# Altium PCB SMA Dual Filter.PcbDoc
Units mm, origin at the board's own origin, x right, y up, seen from the top; angles counter-clockwise.
Board outline 12 x 7.2 mm, 4 copper layers (Top Layer, Layer 1, Layer 2, Bottom Layer), stack 0.771 mm thick; 10 components, 4 nets, 38 pads, 60 vias.
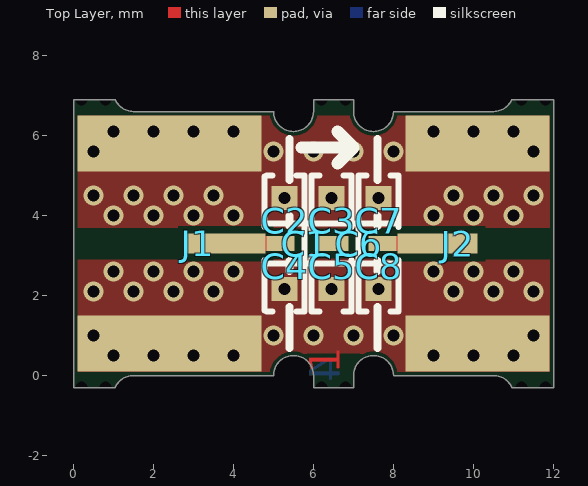
[diagram p0: Top Layer view]
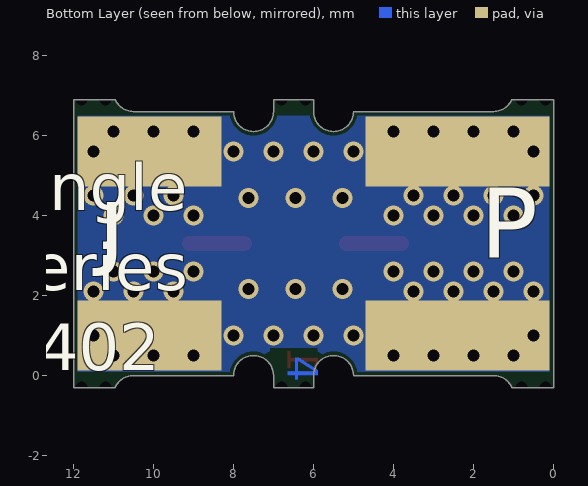
[diagram p1: Bottom Layer view, seen from below]
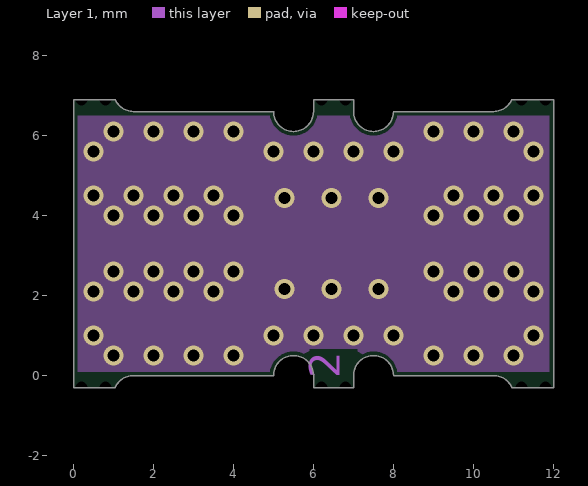
[diagram p2: Layer 1]
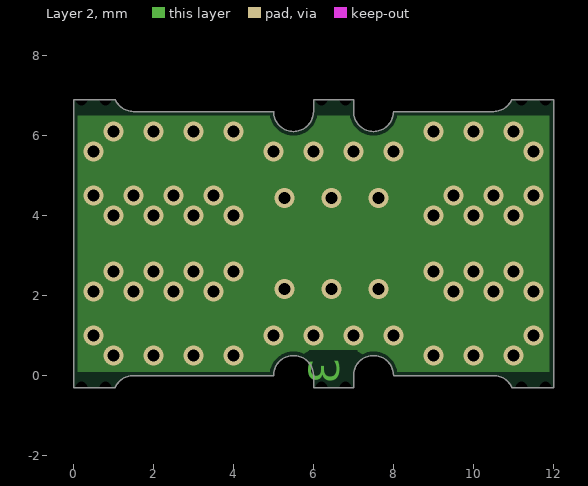
[diagram p3: Layer 2]

## Layer stack, top to bottom
Top Solder: solder mask 0.0102, Solder Resist, Dk 3.8
Top Layer: signal copper 0.035
Dielectric 2: prepreg 0.2104, PP-006, Dk 4.4
Layer 1: signal copper 0.0152
Dielectric 1: dielectric 0.25, FR-4, Dk 4.6
Layer 2: signal copper 0.0152
Dielectric 3: prepreg 0.2104, PP-006, Dk 4.4
Bottom Layer: signal copper 0.035
Bottom Solder: solder mask 0.0102, Solder Resist, Dk 3.8

## Board outline
0,-0.3 1.042,-0.3 cw(c1.5,-0.5) 1.5,0 5,0 cw(c5.5,0) 5.5,0.5 cw(c5.5,0) 6,0 6,-0.3 7,-0.3 7,0 cw(c7.5,0) 7.5,0.5 cw(c7.5,0) 8,0 10.5,0 cw(c10.5,-0.5) 10.958,-0.3 12,-0.3 12,6.9 10.958,6.9 cw(c10.5,7.1) 10.5,6.6 8,6.6 cw(c7.5,6.6) 7.5,6.1 cw(c7.5,6.6) 7,6.6 7,6.9 6,6.9 6,6.6 cw(c5.5,6.6) 5.5,6.1 cw(c5.5,6.6) 5,6.6 1.5,6.6 cw(c1.5,7.1) 1.042,6.9 0,6.9

## Design rules (kind name [scope] priority, off if disabled: settings)
BoardOutlineClearance [All] p1: gap=0.1 ignorepadtopadclearanceinfootprint=FALSE
Clearance [All] p1: gap=0.2 ignorepadtopadclearanceinfootprint=FALSE
ComponentClearance ComponentClearance_C1 [InComponent('C1') OR InComponent('C6')] p1: gap=-0.5 collisioncheckmode=3 verticalgap=0.254 showdistances=TRUE
ComponentClearance [All] p2: gap=0.254 collisioncheckmode=3 verticalgap=0.254 showdistances=TRUE donotcheckwithout3dbody=TRUE
MinimumSolderMaskSliver [All] p1: minsoldermaskwidth=0.1
PlaneClearance [All] p1: clearance=0.2
PolygonConnect [All] p1: connectstyle=Direct reliefconductorwidth=0.254 reliefentries=4 polygonreliefangle="90 Angle" airgapwidth=0.254
RoutingVias [All] p1: holewidth=0.3 width=0.6 viastyle="Through Hole" minholewidth=0.15 minwidth=0.45 maxholewidth=6.3 maxwidth=6.6
SilkToSilkClearance [All] p1: silktosilkclearance=-3
SilkToSolderMaskClearance [IsPad] p1: minsilkscreentomaskgap=-3 clearancetoexposedcopper=TRUE
SolderMaskExpansion SolderMaskExpansion_Via [IsVia] p1: expansion=0.102 istentingtop=TRUE
SolderMaskExpansion [All] p2: expansion=0.05 istentingtop=FALSE
Width [All] p1: maxlimit=0.37 minlimit=0.37 preferedwidth=0.37
25 further rules are at their usual default settings.

## Components (designator, comment, footprint, x,y, rotation, side; value= is the part's Value field where it differs from the comment)
C1 "30 pF" "CAP 0402_1005"#1 5.775,3.3 r0 top
C2 "30 pF" "CAP 0402_1005"#2 5.275,4 r90 top
C3 "30 pF" "CAP 0402_1005"#2 6.45,4 r90 top
C4 "30 pF" "CAP 0402_1005"#3 5.275,2.6 r90 top
C5 "30 pF" "CAP 0402_1005"#3 6.45,2.6 r90 top
C6 "30 pF" "CAP 0402_1005"#1 7.125,3.3 r180 top
C7 "30 pF" "CAP 0402_1005"#2 7.625,4 r90 top
C8 "30 pF" "CAP 0402_1005"#3 7.625,2.6 r90 top
J1 "EMPCB.SMAMSTP.A.NI" "TAOGLAS EMPCB.SMAMSTP.A.NI" 0,3.3 r270 top
J2 "EMPCB.SMAFSTJ.B.HT" "TAOGLAS EMPCB.SMAFSTJ.B.HT" 12,3.3 r90 top

## Footprints (in the part's own frame and the unit in brackets; to place one, negate y for a bottom-side part, rotate by r counter-clockwise, add the part's x,y. Pads: shape width x height; smd on the part's side, far side on the other; paste and mask are expansions set on the pad)
"CAP 0402_1005"#1 [mm] "Chip Capacitor, 2-Leads, Body 1.02x0.51mm, IPC Medium Density"
  rect 0.7x0.37 smd: 1(-0.6,0) 2(0.6,0)
  silkscreen extent -1,-0.5 1,0.5, body extent -0.5,-0.26 0.5,0.26, height 0.52
"CAP 0402_1005"#2 [mm] "Chip Capacitor, 2-Leads, Body 1.02x0.51mm, IPC Medium Density"
  rect 0.3x0.3 smd: 1(-0.7,0)
  rect 0.6x0.64 smd: 2(0.44,0)
  silkscreen extent -1,-0.5 1,0.5, body extent -0.5,-0.26 0.5,0.26, height 0.52
"CAP 0402_1005"#3 [mm] "Chip Capacitor, 2-Leads, Body 1.02x0.51mm, IPC Medium Density"
  rect 0.6x0.64 smd: 1(-0.44,0)
  rect 0.3x0.3 smd: 2(0.7,0)
  silkscreen extent -1,-0.5 1,0.5, body extent -0.5,-0.26 0.5,0.26, height 0.52
"TAOGLAS EMPCB.SMAFSTJ.B.HT" [mm] "SMA Straight PCB Edge Mount/End Launch, Jack, Gold, 50O, Connector Solder Attachment"
  rect 1.4x3.6 smd paste+0: G(-2.5,1.9) G(2.5,1.9)
  rect 1.75x3.6 smd far side paste+0: G(-2.3,1.9) G(2.3,1.9)
  rect 0.5x2 smd paste+0: S(0,2.9)
  silkscreen extent -2.61,4.4 2.61,4.4, body extent -3.18,-9.5 3.18,3.8, height 3.55
"TAOGLAS EMPCB.SMAMSTP.A.NI" [mm] "SMA(M)ST for PCB Edge Mount Nickel Plating 0.94mm board"
  rect 1.4x4.6 smd paste+0: G(-2.5,2.4) G(2.5,2.4)
  rect 1.75x4.6 smd far side paste+0: G(-2.3,2.4) G(2.3,2.4)
  rect 0.5x2 smd paste+0: S(0,3.8)
  silkscreen extent -2.61,5.4 2.61,5.4, body extent -4.62,-12.7 4.62,4.75, height 4.35

## Part data
C1 C2 C3 C4 C5 C6 C7 C8: library part QCCF251Q300J1GV001T, "HIGH-Q MLC CAPACITOR, C-SERIES,", Device Package="0402 (1005 Metric)", manufacturer="Johanson Technology Inc.", Operating Temperature="-55°C ~ 150°C", Supplier Part Number 1=712-QCCF251Q300J1GV001TCT-ND, Temperature Coefficient="C0G, NP0", Tolerance=±5%, Voltage - Rated=250V, Applications="RF, Microwave, High Frequency", Capacitance="30 pF", componentlink2description="DigiKey Link", componentlink2url=https://www.digikey.com/en/products/detail/johanson-technology-inc/QCCF251Q300J1GV001T/13542793, Features="High Q, Low Loss", lastupdated="29/10/2023 19:03:48", Lifecycle Status=Active, Minimum Order=10000, Mounting Type="Surface Mount, MLCC", Package / Case="0402 (1005 Metric)", packaging=TapeAndReel, Part Number=QCCF251Q300J1GV001T, Part Status=Active, partid=45268, price=0.03, series=C, Size / Dimension="0.040\" L x 0.020\" W (1.02mm x 0.51mm)", Supplier 1=DigiKey, Thickness (Max)="0.024\" (0.61mm)"
J1: "SMA(M)ST FOR PCB EDGE MOUNT NI P", Housing Color=Silver, manufacturer="Taoglas Limited", Supplier Part Number 1=931-EMPCB.SMAMSTP.A.NI-ND, ComponentLink1Description=Datasheet, ComponentLink1URL=https://www.taoglas.com/datasheets/ConnectorCatalogue.pdf, componentlink2description="DigiKey Link", componentlink2url=https://www.digikey.com/en/products/detail/taoglas-limited/EMPCB-SMAMSTP-A-NI/15998679, Connector Style=SMA, Connector Type="Plug, Male Pin", Contact Termination=Solder, Fastening Type=Threaded, lastupdated="27/10/2023 11:13:02", Lifecycle Status=Active, Minimum Order=1, Mounting Type="Board Edge, End Launch", Number of Ports=1, packaging=Bag, Part Number=EMPCB.SMAMSTP.A.NI, price=3.41, series=-, Shield Termination=Solder, Supplier 1=DigiKey
J2: "CONN SMA JACK STR 50OHM EDGE MNT", Frequency - Max="12.4 GHz", Housing Color=Gold, manufacturer="Taoglas Limited", Supplier Part Number 1=931-1175-ND, ComponentLink1Description=Datasheet, ComponentLink1URL=https://cdn.taoglas.com/datasheets/EMPCB.SMAFSTJ.B.HT.pdf, componentlink2description="DigiKey Link", componentlink2url=https://www.digikey.com/en/products/detail/taoglas-limited/EMPCB-SMAFSTJ-B-HT/3522337, Connector Style=SMA, Connector Type="Jack, Female Socket", Contact Termination=Solder, Fastening Type=Threaded, Impedance="50 Ohms", lastupdated="27/10/2023 11:14:18", Lifecycle Status=Active, Minimum Order=1, Mounting Type="Board Edge, End Launch", Number of Ports=1, packaging=Tray, Part Number=EMPCB.SMAFSTJ.B.HT, Part Status=Active, price=2.86, series=-, Shield Termination=Solder, Supplier 1=DigiKey

## Free pads (board coordinates)
  round 0 hole 0.3 unplated paste-2539.97: M(6.2,-0.3) M1(6.8,-0.3) M2(0.8,-0.3) M2(0.8,6.9) M2(6.8,6.9) M2(11.2,-0.3) M2(11.2,6.9) M3(0.2,-0.3) M3(0.2,6.9) M3(6.2,6.9) M3(11.8,-0.3) M3(11.8,6.9)

## Via types
v1: diameter 0.5, hole 0.3, Top Layer to Bottom Layer, tented both sides, 60 vias

## Nets (pads, with @x,y where several pads share a name; then routed paths per layer and width w, separated by ;. In a path a pad name is that pad's centre, name@x,y a point inside that pad or via, vN(x,y) a via of type N, cw(c..) or ccw(c..) an arc to the next point about the centre after c; other vN are vias at no path point)
GND: C2.2 C3.2 C4.1 C5.1 C7.2 C8.1 J1.G J2.G
  other v1: 1,0.5 2,0.5 3,0.5 4,0.5 9,0.5 10,0.5 11,0.5 0.5,1 5,1 6,1 7,1 8,1 11.5,1 0.5,2.1 1.5,2.1 2.5,2.1 3.5,2.1 9.5,2.1 10.5,2.1 11.5,2.1 5.275,2.16 6.45,2.16 7.625,2.16 1,2.6 2,2.6 3,2.6 4,2.6 9,2.6 10,2.6 11,2.6 1,4 2,4 3,4 4,4 9,4 10,4 11,4 5.275,4.44 6.45,4.44 7.625,4.44 0.5,4.5 1.5,4.5 2.5,4.5 3.5,4.5 9.5,4.5 10.5,4.5 11.5,4.5 0.5,5.6 5,5.6 6,5.6 7,5.6 8,5.6 11.5,5.6 1,6.1 2,6.1 3,6.1 4,6.1 9,6.1 10,6.1 11,6.1
IN: C1.1 C2.1 C4.2 J1.S | length 1.4
  Top Layer w0.37: J1.S C1.1
MID: C1.2 C3.1 C5.2 C6.2
OUT: C6.1 C7.1 C8.2 J2.S | length 1.4
  Top Layer w0.37: C6.1 J2.S

## Polygon pours and split planes (outlines as drawn)
GND on Top Layer "GND_L01_P000" (solid, remove dead copper, pour order 0): 0.1,6.5 0.1,0.1 11.9,0.1 11.9,6.5
GND on Layer 1 "GND_L02_P001" (solid, remove dead copper, pour order 1): 0,0.1 0,6.5 12,6.5 12,0.1
GND on Layer 2 "GND_L03_P002" (solid, remove dead copper, pour order 2): 0,0.1 0,6.5 12,6.5 12,0.1
GND on Bottom Layer "GND_L04_P003" (solid, remove dead copper, pour order 3): 0,0.1 0,6.5 12,6.5 12,0.1

## Other copper
Top Layer:
  pour cut-out: 10.3,3.7 12,3.7 12,2.9 10.3,2.9
  pour cut-out: 2.6,3.7 0,3.7 0,2.9 2.6,2.9
  text "1" at 6.9,0.048 h1.3 r90
Layer 1:
  text "2" at 6.9,-0.066 h1.3 r90
Layer 2:
  text "3" at 6.889,0.446 h1.3 r90
Bottom Layer:
  text "4" at 6.9,0.49 h1.3 r90

## Silkscreen, mask and mechanical layers (free items; w line width, h text height)
Top Overlay:
  lines w0.3: 5.7,5.7 7,5.7 ; 6.6,5.3 7,5.7 ; 6.6,6.1 7,5.7
Bottom Overlay:
  text "J" at 11.4,2.388 h3
  text "P" at 1.826,2.37 h3
  text "single / series / 0402" at 13.91,-0.251 h2
Board Shape:
  lines w0.1: 1.5,0 ccw(c1.5,-0.5) 1.042,-0.3 0,-0.3 0,6.9 1.042,6.9 ccw(c1.5,7.1) 1.5,6.6 ; 1.5,0 1.5,0 ; 1.5,0 5,0 cw(c5.5,0) 5.5,0.5 ; 1.5,6.6 5,6.6 ccw(c5.5,6.6) 5.5,6.1 ; 1.5,6.6 1.5,6.6 ; 5.5,0.5 cw(c5.5,0) 6,0 6,-0.3 7,-0.3 7,0 cw(c7.5,0) 7.5,0.5 ; 5.5,0.5 5.5,0.5 ; 5.5,6.1 ccw(c5.5,6.6) 6,6.6 6,6.9 7,6.9 7,6.6 ccw(c7.5,6.6) 7.5,6.1 ; 5.5,6.1 5.5,6.1 ; 7.5,0.5 cw(c7.5,0) 8,0 10.5,0 ; 7.5,0.5 7.5,0.5 ; 7.5,6.1 ccw(c7.5,6.6) 8,6.6 10.5,6.6 ; 7.5,6.1 7.5,6.1 ; 10.5,0 cw(c10.5,-0.5) 10.958,-0.3 12,-0.3 12,6.9 10.958,6.9 cw(c10.5,7.1) 10.5,6.6 ; 10.5,0 10.5,0 ; 10.5,6.6 10.5,6.6
Route Tool Path:
  lines w1: 1.5,-1.5 1.5,-0.5 1.502,-0.5 5,-0.5 ; 1.5,8.1 1.5,7.1 5,7.1 ; 5.5,-1.5 5.5,-0.007 ; 5.5,6.607 5.5,8.1 ; 7.5,-1.5 7.5,-0.007 ; 7.5,6.607 7.5,8.1 ; 8,-0.5 8.002,-0.5 10.498,-0.5 10.5,-0.5 10.5,-1.5 ; 8,7.1 10.5,7.1 10.5,8.1
  lines w2: -1,-1 -1,7.9 ; 13,-1 13,7.9